# Altium PCB Tex01.PcbDoc
Units mil, origin at the board's own origin, x right, y up, seen from the top; angles counter-clockwise.
Board outline 2375 x 1295 mil, 2 copper layers (Top Layer, Bottom Layer); 33 components, 25 nets, 97 pads, 11 vias.
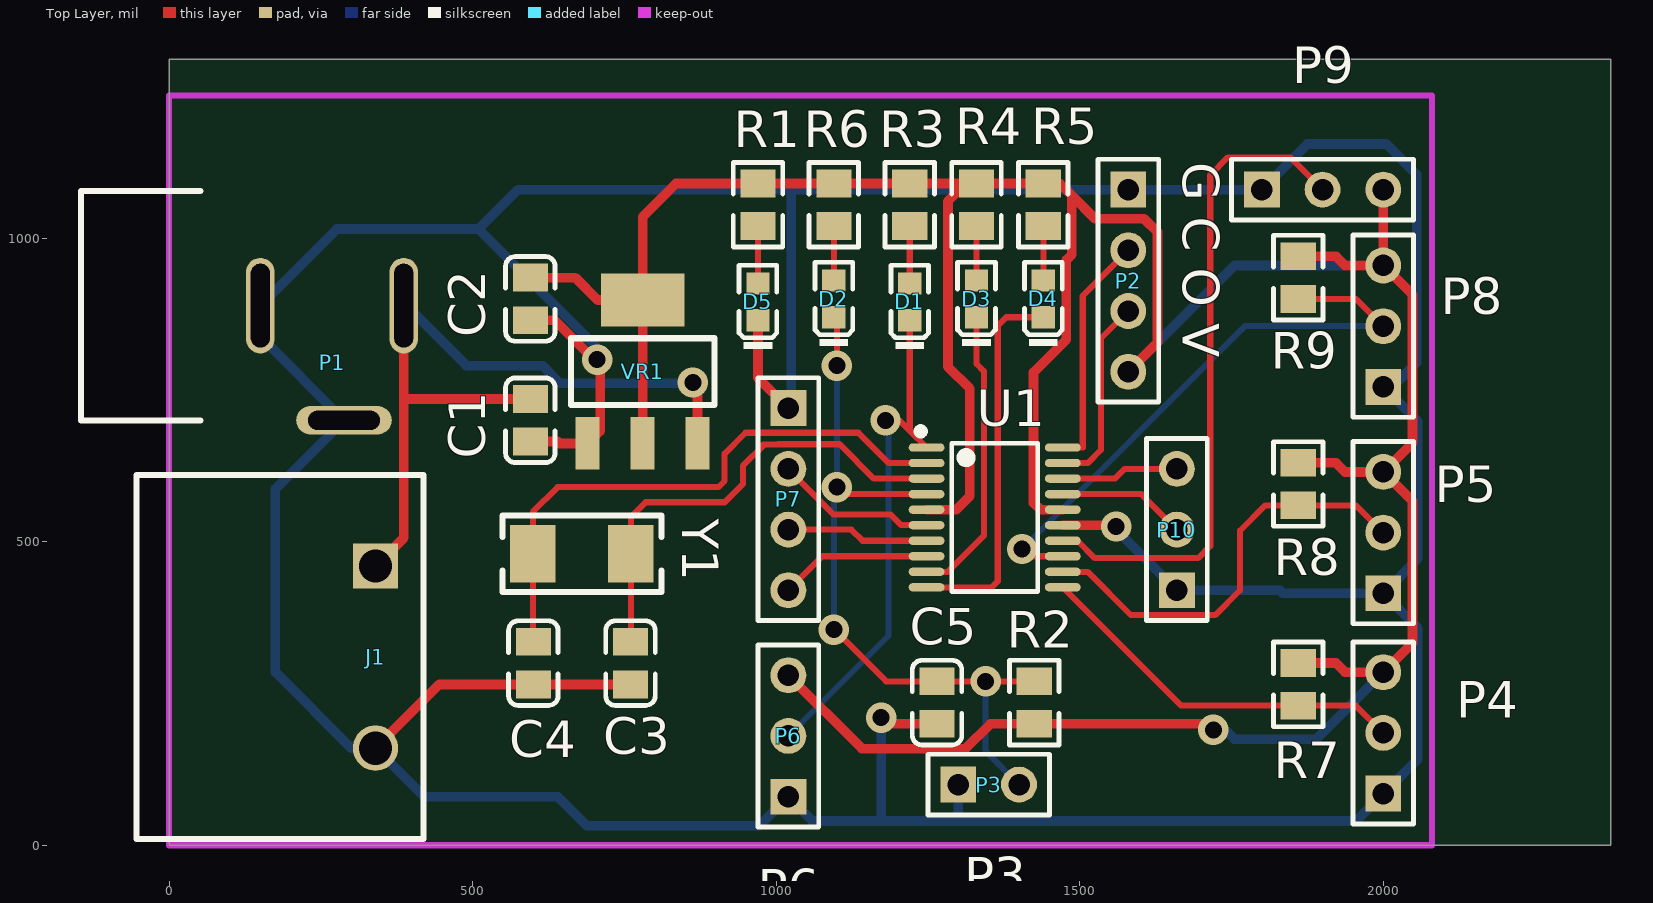
[diagram p0: Top Layer view]
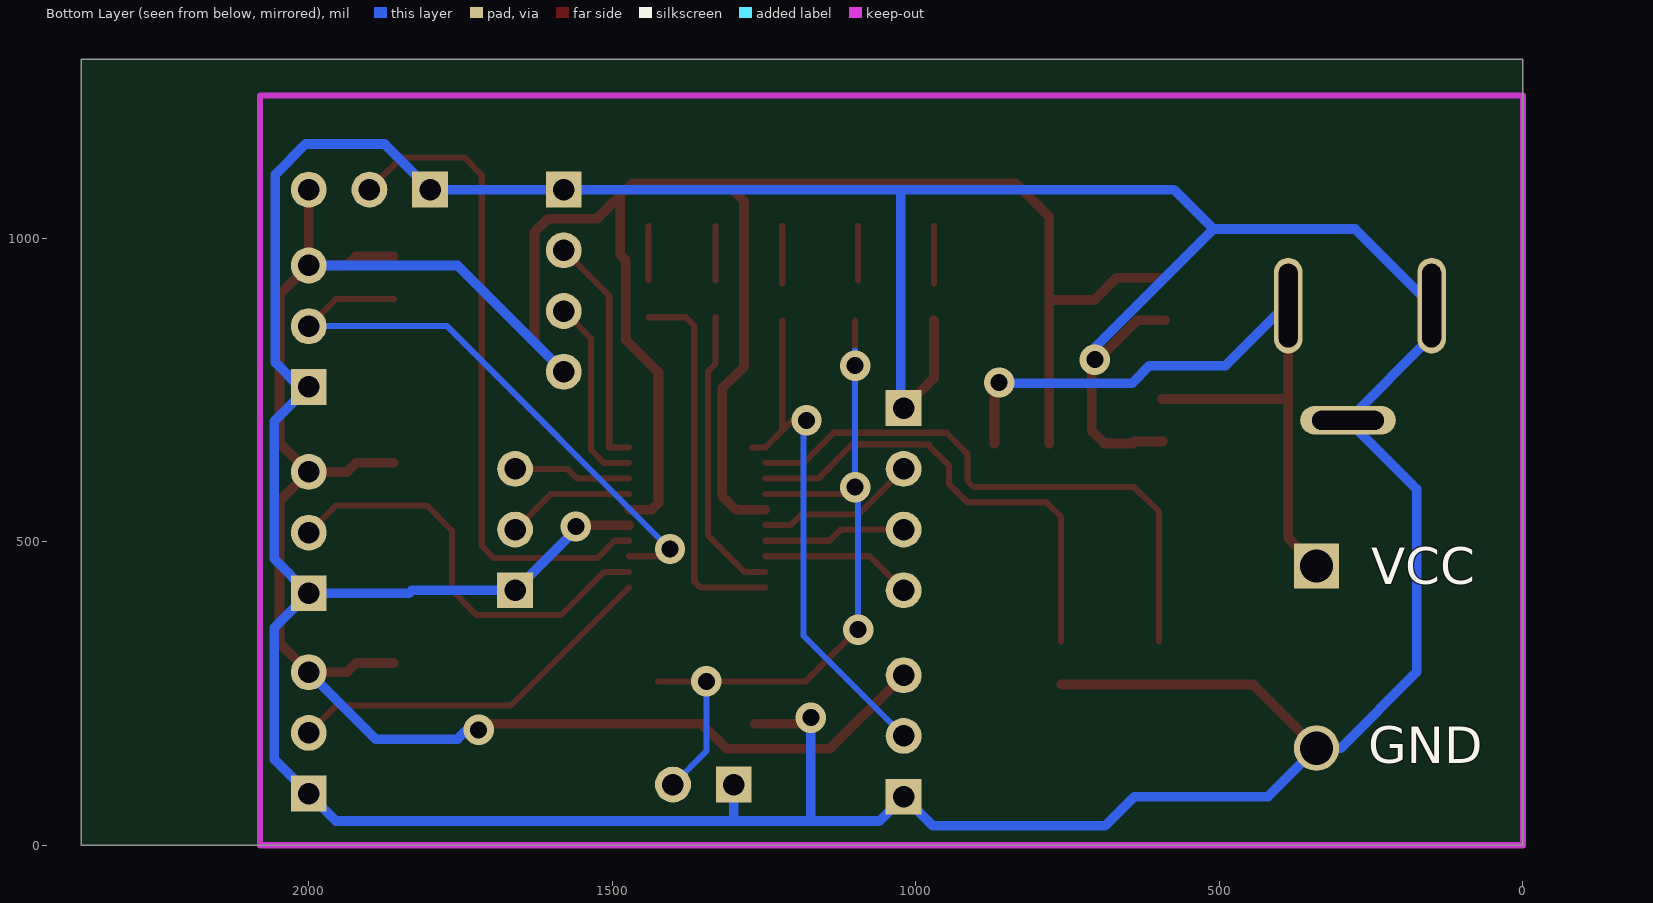
[diagram p1: Bottom Layer view, seen from below]
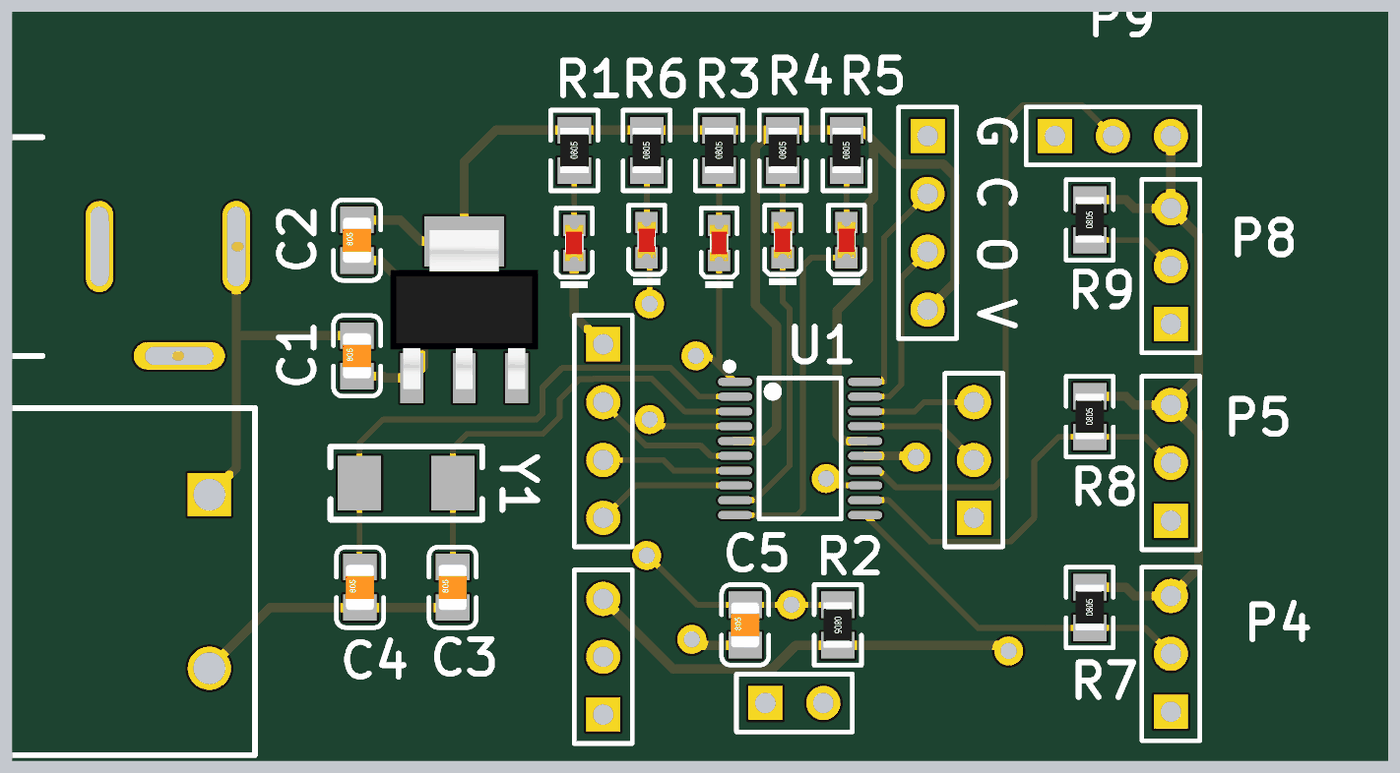
[diagram p2: 3D render of the assembled board from above, using the file's embedded part models]

## Layer stack, top to bottom
Top Layer: signal copper 1.4
Dielectric: dielectric 12.6, FR-4, Dk 4.8
Bottom Layer: signal copper 1.4

## Board outline
0,0 2375,0 2375,1295 0,1295

## Design rules (kind name [scope] priority, off if disabled: settings)
Clearance [All] p1: gap=6
PolygonConnect [All] p1: connectstyle=Relief reliefconductorwidth=10 reliefentries=4 polygonreliefangle="90 Angle"
RoutingVias [All] p1: holewidth=28 width=50 viastyle="Through Hole" minholewidth=28 minwidth=50 maxholewidth=28 maxwidth=50
SilkscreenOverComponentPads [All] p1: minsilkscreentomaskgap=10
SolderMaskExpansion [All] p1: expansion=4
Width Width_V5 [InNet('V5')] p1: maxlimit=50 minlimit=10 preferedwidth=16
Width Width_V33 [InNet('V3.3')] p2: maxlimit=50 minlimit=10 preferedwidth=16
Width Width_GND [InNet('GND')] p3: maxlimit=50 minlimit=10 preferedwidth=16
Width [All] p4: maxlimit=10 minlimit=10 preferedwidth=10
27 further rules are at their usual default settings.

## Components (designator, comment, footprint, x,y, rotation, side; value= is the part's Value field where it differs from the comment)
C1 "100nF(104) 10% 50V" 0805_C 595,700 r90 top
C2 "100nF(104) 10% 50V" 0805_C 595,900 r90 top
C3 "20pF (200) 5% 50V" 0805_C 760,300 r90 top
C4 "20pF (200) 5% 50V" 0805_C 600,300 r90 top
C5 "100nF(104) 10% 50V" 0805_C 1265,235 r90 top
D1 "白灯 0603" 0603_LED_S1 1220,895 r90 top
D2 "黄灯 0603" 0603_LED_S1 1095,900 r90 top
D3 "红灯 0603" 0603_LED_S1 1330,900 r90 top
D4 "蓝灯 0603" 0603_LED_S1 1440,900 r90 top
D5 "绿灯 0603" 0603_LED_S1 970,895 r90 top
J1 "XK7.62-2P" XK7.62-2P 340,460 r0 top
P1 "DC5V" DC005 -145,700 r0 top
P2 "Header 4" HDR1X4 1580,1080 r270 top
P3 "Header 2" HDR1X2 1300,100 r0 top
P4 "Header 3" HDR1X3 2000,85 r90 top
P5 "Header 3" HDR1X3 2000,415 r90 top
P6 "Header 3" HDR1X3 1020,80 r90 top
P7 "Header 4" HDR1X4 1020,720 r270 top
P8 "Header 3" HDR1X3 2000,755 r90 top
P9 "Header 3" HDR1X3 1800,1080 r0 top
P10 "Header 3" HDR1X3 1660,420 r90 top
R1 "1KΩ (1001) ±1%" 0805_R 970,1055 r90 top
R2 "10KΩ (1002) ±1%" 0805_R 1425,235 r270 top
R3 "1KΩ (1001) ±1%" 0805_R 1220,1055 r90 top
R4 "1KΩ (1001) ±1%" 0805_R 1330,1055 r90 top
R5 "1KΩ (1001) ±1%" 0805_R 1440,1055 r90 top
R6 "1KΩ (1001) ±1%" 0805_R 1095,1055 r90 top
R7 "10KΩ (1002) ±1%" 0805_R 1860,265 r90 top
R8 "10KΩ (1002) ±1%" 0805_R 1860,595 r90 top
R9 "10KΩ (1002) ±1%" 0805_R 1860,935 r90 top
U1 "STM32F030F4P6" TSSOP-20 1360,540 r270 top
VR1 "AMS1117-3.3" SOT-223 780,780 r270 top
Y1 "8MHz ±20ppm 20pF" SMD-5032_2P 680,480 r0 top

## Footprints (in the part's own frame and the unit in brackets; to place one, negate y for a bottom-side part, rotate by r counter-clockwise, add the part's x,y. Pads: shape width x height; smd on the part's side, far side on the other; paste and mask are expansions set on the pad)
0603_LED_S1 [mm]
  rect 0.93x0.98 smd: A(0.77,0) K(-0.77,0)
  silkscreen extent -1.98,-0.79 1.54,0.79, body extent -0.8,-0.4 0.8,0.4, height 0.6
0805_C [mm]
  rect 1.16x1.47 smd: 1(-0.89,0) 2(0.89,0)
  silkscreen extent -1.77,-1.04 1.77,1.04, body extent -1,-0.63 1,0.63, height 0.77
0805_R [mm]
  rect 1.16x1.47 smd: 1(-0.89,0) 2(0.89,0)
  silkscreen extent -1.77,-1.03 1.77,1.03, body extent -1,-0.63 1,0.63, height 0.49
DC005 [mm]
  oval 1.2x4 hole 0.8 slot 3.5 at 90 deg: 1(13.5,4.8) 3(7.5,4.8)
  oval 4x1.2 hole 0.8 slot 3 at 0 deg: 2(11,0)
  silkscreen extent 0,0 5,9.6
HDR1X2 [mm] "Connector; Header; 2 Position"
  rect 1.5x1.5 hole 0.9: 1(0,0)
  round 1.5 hole 0.9: 2(2.54,0)
  silkscreen extent -1.27,-1.27 3.81,1.27
HDR1X3 [mm] "Connector; Header; 3 Position"
  rect 1.5x1.5 hole 0.9: 1(0,0)
  round 1.5 hole 0.9: 2(2.54,0) 3(5.08,0)
  silkscreen extent -1.27,-1.27 6.35,1.27
HDR1X4 [mm] "Connector; Header; 4 Position"
  rect 1.5x1.5 hole 0.9: 1(0,0)
  round 1.5 hole 0.9: 2(2.54,0) 3(5.08,0) 4(7.62,0)
  silkscreen extent -1.27,-1.27 8.89,1.27
SMD-5032_2P [mm]
  rect 1.9x2.4 smd: 1(-2.05,0) 2(2.05,0)
  silkscreen extent -3.33,-1.6 3.33,1.6
SOT-223 [mm]
  rect 2.2x1 smd: 1(3,-2.3) 2(3,0) 3(3,2.3)
  rect 2.2x3.5 smd: 2(-3,0)
  silkscreen extent -1.4,-3 1.4,3, body extent -3.49,-3.24 3.49,3.24, height 1.64
TSSOP-20 [mm]
  oval 0.35x1.5 smd: 1(-2.925,-2.85) 2(-2.275,-2.85) 3(-1.625,-2.85) 4(-0.975,-2.85) 5(-0.325,-2.85) 6(0.325,-2.85) 7(0.975,-2.85) 8(1.625,-2.85) 9(2.275,-2.85) 10(2.925,-2.85) 11(2.925,2.85) 12(2.275,2.85) 13(1.625,2.85) 14(0.975,2.85) 15(0.325,2.85) 16(-0.325,2.85) 17(-0.975,2.85) 18(-1.625,2.85) 19(-2.275,2.85) 20(-2.925,2.85)
  silkscreen extent -3.75,-3.25 3.1,1.8
XK7.62-2P [mm]
  rect 1.9x1.9 hole 1.4: 1(0,0)
  round 1.9 hole 1.4: 2(0,-7.62)
  silkscreen extent -10,-11.43 2,3.81

## Part data
C1 C2 C5: library part "0805 100nF(104) 10% 50V", "贴片电容"
C3 C4: library part "0805 20pF (200) 5% 50V", "贴片电容"
D1: library part "0603 白灯", "发光二极管"
D2: library part "0603 黄灯", "发光二极管"
D3: library part "0603 红灯", "发光二极管"
D4: library part "0603 蓝灯", "发光二极管"
D5: library part "0603 绿灯", "发光二极管"
P1: library part "Header 3", "Header, 3-Pin"
P2 P7: "Header, 4-Pin"
P3: "Header, 2-Pin"
P4 P5 P6 P8 P9 P10: "Header, 3-Pin"
R1 R3 R4 R5 R6: library part "0805 1KΩ (1001) 1%", "贴片电阻"
R2 R7 R8 R9: library part "0805 10KΩ (1002) 1%", "贴片电阻"
U1: "ARM"
VR1: library part "SOT-223 AMS1117-3.3", "低压差线性稳压(LDO)"
Y1: library part "SMD-5032_2P 8MHz 20ppm 20pF", "贴片晶振"

## Via types
v1: diameter 50, hole 28, Top Layer to Bottom Layer, 11 vias

## Nets (pads, with @x,y where several pads share a name; then routed paths per layer and width w, separated by ;. In a path a pad name is that pad's centre, name@x,y a point inside that pad or via, vN(x,y) a via of type N, cw(c..) or ccw(c..) an arc to the next point about the centre after c; other vN are vias at no path point)
A0: P7.2 U1.6 | length 266.8
  Top Layer w10: P7.2 1020,619.09 1094.09,545 1188.2,545 1206,527.2 U1.6
A1: P7.3 U1.7 | length 235.4
  Top Layer w10: P7.3 1124,520 1142.39,501.61 U1.7
A2: P7.4 U1.8 | length 251
  Top Layer w10: P7.4 1076.02,476.02 U1.8
BOOT0: D1.K P6.2 U1.1 | length 920
  Top Layer w10: v1(1180,700) 1202.95,700 U1.1 ; D1.K 1220,682.95 U1.1 ; U1.1@1270,655.16 U1.1
  Bottom Layer w10: P6.2 1185,345 1185,695 v1(1180,700)
D5: P4.2 R7.1 U1.11 | length 627.1
  Top Layer w10: U1.11 1667.09,229.96 R7.1 1955.04,229.96 P4.2
D6: P5.2 R8.1 U1.12 | length 708.4
  Top Layer w10: U1.12 1513,450.43 1584.43,379 1723,379 1764,420 1764,518 1805.96,559.96 R8.1 1955.04,559.96 P5.2
D7: P8.2 R9.1 U1.13 | length 977.8
  Top Layer w10: v1(1405,488) 1416.98,476.02 U1.13 ; R9.1 1955.04,899.96 P8.2
  Bottom Layer w10: v1(1405,488) 1772,855 P8.2
D8: P9.2 U1.14 | length 1092.9
  Top Layer w10: U1.14 1496.39,501.61 1525,473 1695,473 1715,493 1715,1104 1744,1133 1847,1133 P9.2
GND: C1.1 C2.1 C3.1 C4.1 C5.1 D5.K J1.2 P1.2 P1.3 P2.1 P3.1 P4.1 P5.1 P6.1 P7.1 P8.1 P9.1 P10.1 U1.15 VR1.1 | length 8536.5
  Top Layer w16: P1.3@150.28,837.79 P1.3 ; P1.2@284,700 P1.2 ; J1.2 444.96,264.96 568.04,264.96 C4.1 C3.1 ; C2.1@589,864.96 C2.1 635.04,864.96 710,790 710,682.44 VR1.1 643.07,661.89 640,664.96 C1.1 C1.1@593,664.96 ; D5.K 970,770 P7.1 ; v1(1172.94,210.06) 1183.04,199.96 C5.1 ; U1.15 1557.8,527.2 v1(1560,525) v1@1560.4,519.6
  Bottom Layer w16: v1@705,810 705,795 710,790 710,815 510,1015 ; P7.1@1025,725 1025,1080 ; 1172.94,42.06 v1(1172.94,210.06) ; P3.1 1300,40 ; v1(1560,525) 1560.4,519.6 P10.1 1830,420 1835,415 P5.1 ; 510,1015 575,1080 1025,1080 ; 510,1015 276.3,1015 P1.3 150.28,837.79 P1.2 175,586.93 175,285 300,160 J1.2 420,80 640,80 688,32 972,32 P6.1 1060,40 1300,40 ; 1025,1080 P2.1 P9.1 1875,1155 2005,1155 2055,1105 2055,795 2015,755 P8.1 2057,698 2057,472 P5.1 ; 1300,40 1955,40 P4.1 2057,142 2057,358 P5.1
  other v1: 705,800
LED1: D3.K U1.9 | length 483.5
  Top Layer w10: U1.9 1282.43,450.43 1342,510 1342,781 1330,793 D3.K
LED2: D4.K U1.10 | length 623
  Top Layer w10: U1.10 1355,424.84 1365,434.84 1365,855.69 1379,869.69 D4.K
NetD1_A: D1.A R3.1 | length 94.6
  Top Layer w10: D1.A R3.1
NetD2_A: D2.A R6.1 | length 89.6
  Top Layer w10: D2.A R6.1
NetD3_A: D3.A R4.1 | length 89.6
  Top Layer w10: D3.A R4.1
NetD4_A: D4.A R5.1 | length 89.6
  Top Layer w10: D4.A R5.1
NetD5_A: D5.A R1.1 | length 94.6
  Top Layer w10: D5.A R1.1
NRST: C5.2 D2.K P3.2 R2.1 U1.4 | length 1276.9
  Top Layer w10: v1@1095,595 v1(1100,590) 1111.61,578.39 U1.4 ; v1@1095.67,355.67 1181.3,270.04 C5.2 R2.1 ; v1(1100,790) D2.K@1100,864.69
  Bottom Layer w10: v1(1095,355) v1@1095,590 ; v1(1100,590) 1100,815 v1(1100,790) ; v1(1345,270) 1345,155 P3.2
PF0: C4.2 U1.2 Y1.1 | length 963
  Top Layer w10: C4.2@599.29,335.75 Y1.1 599.29,549.29 640,590 905,590 915,600 915,645 949.47,679.47 1135.53,679.47 1185.43,629.57 U1.2
PF1: C3.2 U1.3 Y1.2 | length 784
  Top Layer w10: C3.2@760.71,335.75 Y1.2 760.71,540.71 785,565 915,565 945,595 945,625 980,660 ; 978.66,660 1002.69,660 1003.21,660.53 1104.47,660.53 1161.02,603.98 U1.3
SWCLK: P2.2 U1.20 | length 388.7
  Top Layer w10: U1.20 1505,655.16 1505,905 P2.2
SWDIO: P2.3 U1.19 | length 319.2
  Top Layer w10: U1.19 1513.43,629.57 1535,651.13 1535,835 P2.3
U1R: P10.3 U1.18 | length 194.4
  Top Layer w10: U1.18 1558,603.98 1574.02,620 P10.3
U1T: P10.2 U1.17 | length 212
  Top Layer w10: U1.17 1601.61,578.39 P10.2
V3.3: C2.2 P2.4 P4.3 P5.3 P6.3 P8.3 P9.3 R1.2 R2.2 R3.2 R4.2 R5.2 R6.2 R7.2 R8.2 R9.2 U1.5 U1.16 VR1.2 | length 5853.1
  Top Layer w16: C2.2 669,935.04 705.93,898.11 VR1.2@780,898.11 ; VR1.2@780,661.89 VR1.2@780,898.11 ; P6.3 1141,159 1312,159 1352.96,199.96 R2.2 1710.04,199.96 v1(1720,190) ; U1.5 1296.8,552.8 1319,575 1319,752 1283,788 1283,1061 R4.2@1312.04,1090.04 ; U1.16 1435,552.8 1424,563.8 1424,779 1478,833 1478,964 1487,973 1487,1070.04 ; P2.4 1628,828 1628,1010 1606,1032 1525.04,1032 1487,1070.04 ; R7.2 1922,300.04 1937.04,285 P4.3 2048,333 2048,567 P5.3 ; R8.2 1922,630.04 1937.04,615 P5.3 ; R9.2 1922,970.04 1937.04,955 P8.3 ; P9.3 P8.3 ; VR1.2@780,898.11 780,1035.04 835,1090.04 R1.2 R6.2 R3.2 R4.2@1312.04,1090.04 ; R4.2@1312.04,1090.04 R4.2 R5.2 1467,1090.04 1487,1070.04 ; P5.3 2048,663 2048,907 P8.3
  Bottom Layer w16: P2.4 1755,955 P8.3 ; v1(1720,190) 1730,200 1755,175 1754.5,174.5 1889.5,174.5 P4.3
V5: C1.2 J1.1 P1.1 VR1.3 | length 1285.2
  Top Layer w16: J1.1 386.5,506.5 P1.1 ; 391.46,735.04 C1.2 ; v1(862.63,762.37) 870.55,754.45 VR1.3
  Bottom Layer w16: P1.1 391.02,888.98 490,790 615,790 644,761 861.27,761 v1(862.63,762.37)

## Keep-outs
Keep-Out Layer:
  lines w10: 0,0 0,1235 2080,1235 2080,0 0,0

## Silkscreen, mask and mechanical layers (free items; w line width, h text height)
Top Overlay:
  text "G C O V" at 1670,1125 h60 r270
Bottom Overlay:
  text "VCC" at 250,430 h60
  text "GND" at 255,135 h60